# Altium PCB Bargraph_64_MCU.PcbDoc
Units mm, origin at the board's own origin, x right, y up, seen from the top; angles counter-clockwise.
Board outline 80 x 22 mm, 2 copper layers (Top Layer, Bottom Layer); 80 components, 82 nets, 272 pads, 71 vias.
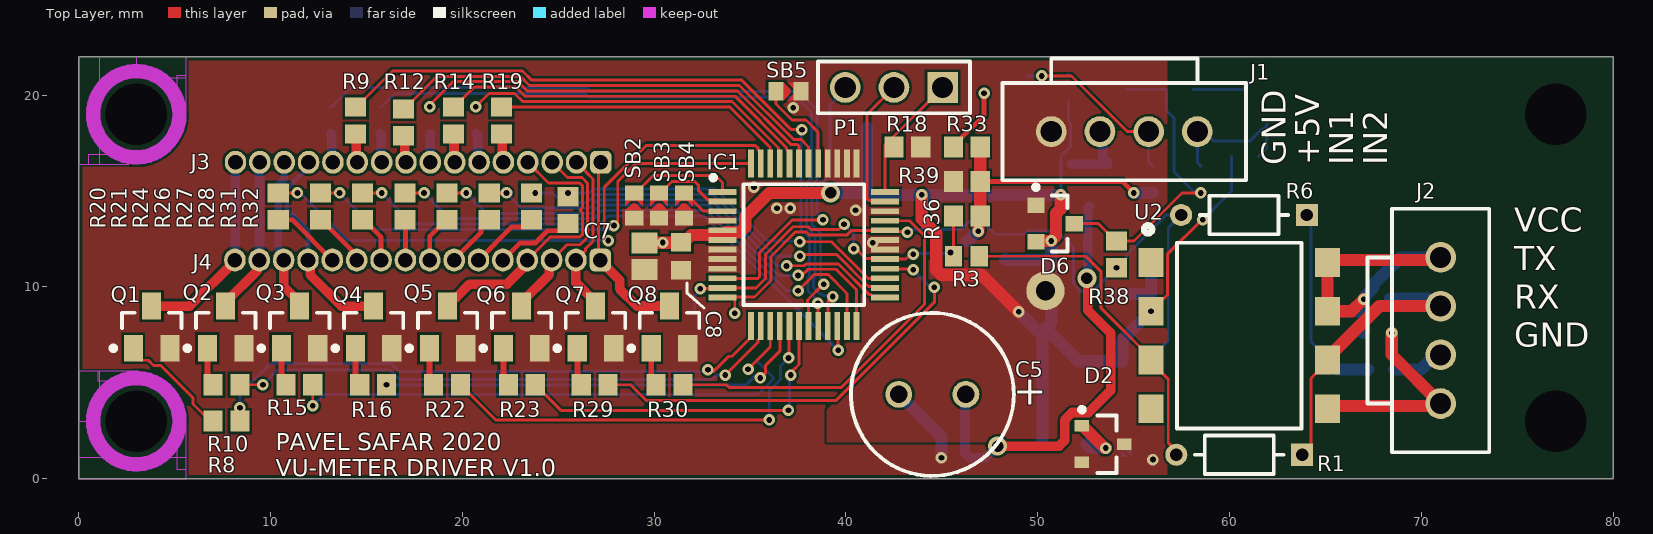
[diagram p0: Top Layer view]
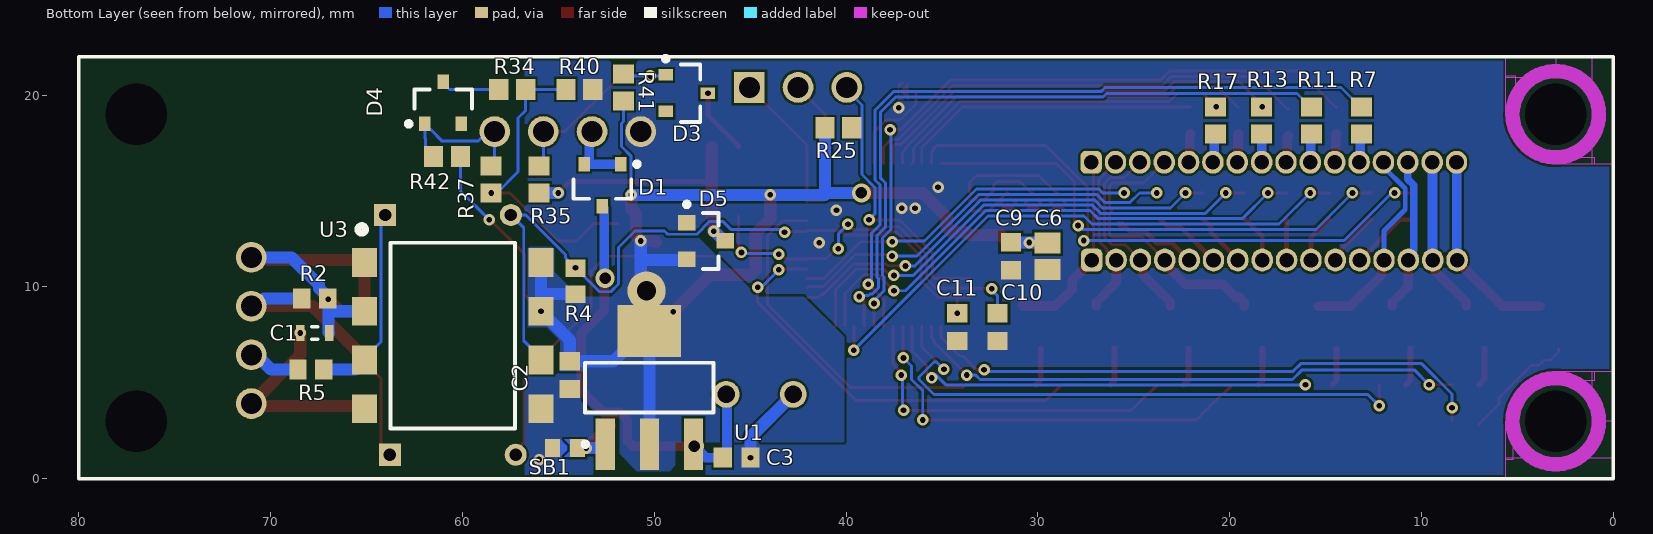
[diagram p1: Bottom Layer view, seen from below]

## Layer stack, top to bottom
Top Solder: solder mask 0.0102, Solder Resist, Dk 3.5
Top Layer: signal copper 0.0356
Dielectric 1: dielectric 0.32, FR-4, Dk 4.8
Bottom Layer: signal copper 0.0356
Bottom Solder: solder mask 0.0102, Solder Resist, Dk 3.5

## Board outline
0,0 80,0 80,22 0,22

## Design rules (kind name [scope] priority, off if disabled: settings)
BoardOutlineClearance [All] p1: gap=0.2 ignorepadtopadclearanceinfootprint=FALSE except(0.4: Arc-SplitBarrior Arc-SplitContinuation Track-SplitBarrior Track-SplitContinuation SMDPad-SplitBarrior SMDPad-SplitContinuation THPad-SplitBarrior THPad-SplitContinuation Via-SplitBarrior Via-SplitContinuation Fill-SplitBarrior Fill-SplitContinuation Poly-SplitBarrior Poly-SplitContinuation Region-SplitBarrior Region-SplitContinuation Text-SplitBarrior Text-SplitContinuation)
Clearance "Clearance Bottom Layer" [OnLayer('Bottom Layer')] p1: gap=0.127 ignorepadtopadclearanceinfootprint=TRUE except(0.203: Arc-Hole Track-Hole SMDPad-Hole THPad-Hole Via-Hole Fill-Hole Poly-Hole Region-Hole Text-Hole; 0.254: Text-Text)
Clearance "Clearance Top Layer" [OnLayer('Top Layer')] p2: gap=0.127 ignorepadtopadclearanceinfootprint=TRUE except(0.203: Arc-Hole Track-Hole SMDPad-Hole THPad-Hole Via-Hole Fill-Hole Poly-Hole Region-Hole Text-Hole)
Clearance [All] p3: gap=0.2 ignorepadtopadclearanceinfootprint=FALSE except(0.089: Arc-Arc Arc-Track Arc-SMDPad Track-Track Track-SMDPad SMDPad-SMDPad; 0.127: Arc-THPad Arc-Via Track-THPad Track-Via SMDPad-THPad SMDPad-Via THPad-THPad THPad-Via Via-Via; 0.254: Arc-Text Track-Text SMDPad-Text THPad-Text Via-Text Fill-Text Poly-Text Region-Text Text-Text)
HoleSize [All] p1: absolutevalues=TRUE maxlimit=6.3 minlimit=0.2 maxpercent=80.000 minpercent=20.000
MinimumAnnularRing [All] p1: minimumring=0.076
MinimumSolderMaskSliver [All] p1: minsoldermaskwidth=0.1
PlaneConnect [All] p1: planeconnectstyle=Direct reliefexpansion=0.508 reliefentries=4 reliefconductorwidth=0.254 reliefairgap=0.254
PolygonConnect PolygonConnect_1 [All] p1: connectstyle=Direct reliefconductorwidth=0.508 reliefentries=4 polygonreliefangle="90 Angle" airgapwidth=0.254
RoutingCorners [All] p1: cornerstyle=Round minsetback=2.54 maxsetback=2.54
RoutingVias [All] p1: holewidth=0.5 width=1 viastyle="Through Hole" minholewidth=0.2 minwidth=0.45 maxholewidth=1 maxwidth=2
SilkToSilkClearance [All] p1: silktosilkclearance=0.1
SilkToSolderMaskClearance [IsPad] p1: minsilkscreentomaskgap=0.1 clearancetoexposedcopper=TRUE
SolderMaskExpansion SolderMaskExpansion_1 [IsVia] p1: expansion=0 istentingtop=FALSE soldermaskfromhole=TRUE
SolderMaskExpansion pad [All] p2: expansion=0.05 istentingtop=FALSE
Width [All] p1: maxlimit=2.54 minlimit=0.152 preferedwidth=0.152
24 further rules are at their usual default settings.

## Components (designator, comment, footprint, x,y, rotation, side; value= is the part's Value field where it differs from the comment)
C1 "100n/50 X7R 0603" CAPC1608X90X20LL10 67.7,7.6 r180 bottom
C2 "1u/10 0603" SAMS-C0603-2_M 54.4,5.4 r90 bottom
C3 "1u/10 0603" SAMS-C0603-2_M 45.7,1.1 r0 bottom
C5 "ECA-1VM221" PNSC-ECA-1VM221-2 44.5,4.4 r180 top
C6 "10u/10 0805" CAPC2013X140X50LL20T25 29.5,11.6 r90 bottom
C7 "10u/10 0805" CAPC2013X140X50LL20T25 29.5,11.6 r90 top
C8 "100n/50 0603" SAMS-C0603-2_M 31.4,11.6 r90 top
C9 "100n/50 0603" SAMS-C0603-2_M 31.4,11.6 r90 bottom
C10 "10n/50 0603" SAMS-C0603-2_M 32.1,7.9 r90 bottom
C11 "10n/50 0603" SAMS-C0603-2_M 34.2,7.9 r90 bottom
D1 "BAS70-05" INF-SOT23_L 52.7,15.3 r270 bottom
D2 "BAS40" INF-SOT23_L 53.4,1.8 r0 top
D3 "BAS40" INF-SOT23_L 48.3,20.1 r180 bottom
D4 "BAS40" INF-SOT23_L 61,19.6 r90 bottom
D5 "BAS40-04LT1G" ONSC-SOT-23-3-318-08_V 47.3,12.4 r180 bottom
D6 "BAS40-04LT1G" ONSC-SOT-23-3-318-08_V 50.9,13.3 r0 top
IC1 "STM32G030C8T6" QFP50P900X900X160-48N 37.8,12.2 r0 top
J1 "CON_4" 4pos 54.51,18.1 r0 top
J2 "CON_4" 4pos 71,7.73 r90 top
J3 "16pin" 16pos_127 27.22,16.5 r180 top
J4 "16pin" 16pos_127 27.19,11.4 r180 top
P1 "61300311121" 61300311121 42.5,20.4 r180 top
Q1 "FDV303N" FAIR-FDV303N-3_V 3.8,7.9 r90 top
Q2 "FDV303N" FAIR-FDV303N-3_V 7.657,7.9 r90 top
Q3 "FDV303N" FAIR-FDV303N-3_V 11.514,7.9 r90 top
Q4 "FDV303N" FAIR-FDV303N-3_V 15.371,7.9 r90 top
Q5 "FDV303N" FAIR-FDV303N-3_V 19.229,7.9 r90 top
Q6 "FDV303N" FAIR-FDV303N-3_V 23.086,7.9 r90 top
Q7 "FDV303N" FAIR-FDV303N-3_V 26.943,7.9 r90 top
Q8 "FDV303N" FAIR-FDV303N-3_V 30.8,7.9 r90 top
R1 "CF18JT2K20" FP-CF18-MFG 60.5,1.25 r180 top value=2.2kΩ
R2 "1k 5% 0603" RESC1609X50X30ML10T20 67.7,9.4 r180 bottom
R3 "1k 5% 0603" RESC1609X50X30ML10T20 46.275,11.6 r0 top
R4 "1k 5% 0603" RESC1609X50X30ML10T20 54.1,10.3 r270 bottom
R5 "1k 5% 0603" RESC1609X50X30ML10T20 67.9,5.7 r0 bottom
R6 "CF18JT2K20" FP-CF18-MFG 60.75,13.75 r180 top value=2.2kΩ
R7 "330R 0603" RESC1608X55X30ML20T20 13.13,18.681 r90 bottom
R8 "82R 0603" RESC1608X55X30ML20T20 7.7,3 r180 top
R9 "330R 0603" RESC1608X55X30ML20T20 14.43,18.681 r90 top
R10 "82R 0603" RESC1608X55X30ML20T20 7.7,4.9 r180 top
R11 "330R 0603" RESC1608X55X30ML20T20 15.73,18.681 r90 bottom
R12 "330R 0603" RESC1608X55X30ML20T20 16.93,18.581 r90 top
R13 "330R 0603" RESC1608X55X30ML20T20 18.33,18.681 r90 bottom
R14 "330R 0603" RESC1608X55X30ML20T20 19.53,18.681 r90 top
R15 "82R 0603" RESC1608X55X30ML20T20 11.5,4.9 r180 top
R16 "82R 0603" RESC1608X55X30ML20T20 15.35,4.9 r180 top
R17 "330R 0603" RESC1608X55X30ML20T20 20.73,18.681 r90 bottom
R18 "330R 0603" RESC1608X55X30ML20T20 43.2,17.3 r0 top
R19 "330R 0603" RESC1608X55X30ML20T20 22.03,18.681 r90 top
R20 "330R 0603" RESC1608X55X30ML20T20 10.4,14.2 r90 top
R21 "330R 0603" RESC1608X55X30ML20T20 12.6,14.2 r90 top
R22 "82R 0603" RESC1608X55X30ML20T20 19.2,4.9 r180 top
R23 "82R 0603" RESC1608X55X30ML20T20 23.1,4.9 r180 top
R24 "330R 0603" RESC1608X55X30ML20T20 14.8,14.2 r90 top
R25 "2k 5% 0603" RESC1608X55X30ML20T20 40.4,18.3 r0 bottom
R26 "330R 0603" RESC1608X55X30ML20T20 17,14.2 r90 top
R27 "330R 0603" RESC1608X55X30ML20T20 19.2,14.2 r90 top
R28 "330R 0603" RESC1608X55X30ML20T20 21.4,14.2 r90 top
R29 "82R 0603" RESC1608X55X30ML20T20 26.9,4.9 r180 top
R30 "82R 0603" RESC1608X55X30ML20T20 30.8,4.9 r180 top
R31 "330R 0603" RESC1608X55X30ML20T20 23.6,14.2 r90 top
R32 "330R 0603" RESC1608X55X30ML20T20 25.5,14 r90 top
R33 "330R 0603" RESC1608X55X30ML20T20 46.3,17.3 r0 top
R34 "330R 0603" RESC1608X55X30ML20T20 57.4,20.3 r180 bottom
R35 "330R 0603" RESC1608X55X30ML20T20 56,15.6 r270 bottom
R36 "330R 0603" RESC1608X55X30ML20T20 46.3,13.7 r180 top
R37 "330R 0603" RESC1608X55X30ML20T20 58.5,15.6 r270 bottom
R38 "330R 0603" RESC1608X55X30ML20T20 54.1,11.7 r270 top
R39 "330R 0603" RESC1608X55X30ML20T20 46.3,15.5 r0 top
R40 "330R 0603" RESC1608X55X30ML20T20 53.9,20.3 r0 bottom
R41 "330R 0603" RESC1608X55X30ML20T20 51.6,20.4 r270 bottom
R42 "330R 0603" RESC1608X55X30ML20T20 60.8,16.8 r180 bottom
SB1 "0R" SB0603 54.65,1.6 r0 bottom
SB2 "0R" SB0603 28.957,14.246 r270 top
SB3 "0R" SB0603 30.257,14.246 r270 top
SB4 "0R" SB0603 31.557,14.246 r270 top
SB5 "0R" SB0603 37,20.2 r180 top
U1 "LM1117MP-3.3" MP04A_M 50.25,4.75 r90 bottom
U2 "6N137S-P" dip8_smd 60.5,10 r270 top
U3 "6N137S-P" dip8_smd 60.5,10 r270 bottom

## Footprints (in the part's own frame and the unit in brackets; to place one, negate y for a bottom-side part, rotate by r counter-clockwise, add the part's x,y. Pads: shape width x height; smd on the part's side, far side on the other; paste and mask are expansions set on the pad)
4pos [mm]
  round 1.6 hole 1.1: 1(-3.81,0) 2(-1.27,0) 3(1.27,0) 4(3.81,0)
  silkscreen extent -6.35,-2.54 6.35,3.81, body extent -6.35,-2.54 6.35,4.06, height 11.81
16pos_127 [mil]
  rrect50% 44x47 hole 30 mask+2: 1(0,0)
  oval 44x47 hole 30 mask+2: 2(50,0) 3(100,0) 4(150,0) 5(200,0) 6(250,0) 7(300,0) 8(350,0) 9(400,0) 10(450,0) 11(500,0) 12(550,0) 13(600,0) 14(650,0) 15(700,0) 16(750,0)
61300311121 [mm] "Pin Header, pitch 2.54 mm, THT, Vertical, single row, 3p"
  rect 1.6x1.6 hole 1.1: 1(-2.54,0)
  round 1.6 hole 1.1: 2(0,0) 3(2.54,0)
  silkscreen extent -3.96,-1.35 3.96,1.35, body extent -3.81,-1.27 3.81,1.27, height 8.57
CAPC1608X90X20LL10 [mm] "Chip Capacitor, 2-Leads, Body 1.70x0.90mm, IPC High Density"
  rect 0.45x0.85 smd: 1(-0.75,0) 2(0.75,0)
  silkscreen extent -0.15,-0.33 0.15,0.33, body extent -0.85,-0.45 0.85,0.45, height 0.9
CAPC2013X140X50LL20T25 [mm] "Chip Capacitor, 2-Leads, Body 2.00x1.25mm, IPC High Density"
  rect 1.1x1.35 smd: 1(-0.7,0) 2(0.7,0)
  body extent -1.1,-0.72 1.1,0.72, height 1.4
dip8_smd [mm]
  rect 1.5x1.3 smd: 1(-1.27,-4.6) 2(1.27,-4.6) 3(3.81,-4.6) 4(6.35,-4.6) 5(6.35,4.6) 6(3.81,4.6) 7(1.27,4.6) 8(-1.27,4.6)
  silkscreen extent -3.2,-4.95 7.38,3.25, body extent -2.34,-5.07 7.42,5.08, height 3.66
FAIR-FDV303N-3_V [mm] "SOT23, 3-Leads, Body 3.12x1.50mm, Pitch 0.95mm"
  rect 1.4x1 smd: 1(-1.1,0.95) 2(-1.1,-0.95) 3(1.1,0)
  silkscreen extent -1.22,-1.55 0.75,2.12, body extent -0.75,-1.56 0.75,1.56, height 1.2
FP-CF18-MFG [mm]
  rect 1.15x1.15 hole 0.65 paste-1000 mask+0: 1(-3.28,0)
  round 1.15 hole 0.65 paste-1000 mask+0: 2(3.28,0)
  silkscreen extent -2.3,-1 2.3,1
INF-SOT23_L [mm] "SOT23, 3-Leads, Body 2.9x1.3 mm, Pitch 0.95 mm, IPC High Density"
  rect 0.75x0.6 smd: 1(-1.1,0.95) 2(-1.1,-0.95) 3(1.1,0)
  silkscreen extent -1.22,-1.5 0.7,1.92, body extent -0.7,-1.5 0.7,1.5, height 1.1
MP04A_M [mm] "SOT223, 4-Leads, Body 6.5x3.5mm, Pitch 2.3mm, Lead Span 7mm, IPC Low Density"
  rect 2.7x1 smd: 1(-2.95,2.3) 2(-2.95,0) 3(-2.95,-2.3)
  rect 2.7x3.3 smd: 4(2.95,0)
  silkscreen extent -3.07,-3.35 1.3,3.48, body extent -1.86,-3.35 1.86,3.35, height 1.8
ONSC-SOT-23-3-318-08_V [mm] "SOT23, 3-Leads, Body 2.92x1.3mm, Pitch 0.95mm"
  rect 0.9x0.8 smd: 1(-1,0.95) 2(-1,-0.95) 3(1,0)
  silkscreen extent -1.13,-1.46 0.65,2.02, body extent -0.65,-1.46 0.65,1.46, height 1.11
PNSC-ECA-1VM221-2 [mm] "THD, 2-Leads, Dia 8.5mm, Body Length 12.5mm, Pin Spacing 3.5mm"
  round 1.4 hole 0.9: 1(-1.75,0) 2(1.75,0)
  silkscreen extent -4.25,-4.25 4.25,4.25, body extent -4.25,-4.25 4.25,4.25, height 12.5
QFP50P900X900X160-48N [mm]
  rect 1.475x0.3 smd: 1(-4.238,2.75) 2(-4.238,2.25) 3(-4.238,1.75) 4(-4.238,1.25) 5(-4.238,0.75) 6(-4.238,0.25) 7(-4.238,-0.25) 8(-4.238,-0.75) 9(-4.238,-1.25) 10(-4.238,-1.75) 11(-4.238,-2.25) 12(-4.238,-2.75) 25(4.238,-2.75) 26(4.238,-2.25) 27(4.238,-1.75) 28(4.238,-1.25) 29(4.238,-0.75) 30(4.238,-0.25) 31(4.238,0.25) 32(4.238,0.75) 33(4.238,1.25) 34(4.238,1.75) 35(4.238,2.25) 36(4.238,2.75)
  rect 0.3x1.475 smd: 13(-2.75,-4.238) 14(-2.25,-4.238) 15(-1.75,-4.238) 16(-1.25,-4.238) 17(-0.75,-4.238) 18(-0.25,-4.238) 19(0.25,-4.238) 20(0.75,-4.238) 21(1.25,-4.238) 22(1.75,-4.238) 23(2.25,-4.238) 24(2.75,-4.238) 37(2.75,4.238) 38(2.25,4.238) 39(1.75,4.238) 40(1.25,4.238) 41(0.75,4.238) 42(0.25,4.238) 43(-0.25,4.238) 44(-0.75,4.238) 45(-1.25,4.238) 46(-1.75,4.238) 47(-2.25,4.238) 48(-2.75,4.238)
  silkscreen extent -4.85,-3.15 3.15,3.62, body extent -4.5,-4.5 4.5,4.5, height 1.6
RESC1608X55X30ML20T20 [mm] "Chip Resistor, 2-Leads, Body 1.60x0.80mm, IPC Low Density"
  rect 1x1.1 smd: 1(-0.7,0) 2(0.7,0)
  body extent -0.9,-0.5 0.9,0.5, height 0.55
RESC1609X50X30ML10T20 [mm] "Chip Resistor, 2-Leads, Body 1.55x0.85mm, IPC Low Density"
  rect 0.9x1.05 smd: 1(-0.675,0) 2(0.675,0)
  body extent -0.82,-0.48 0.82,0.48, height 0.5
SAMS-C0603-2_M [mm] "Chip Capacitor, 2-Leads, Body 1.70x0.90mm, IPC Low Density"
  rect 0.95x1.05 smd: 1(-0.725,0) 2(0.725,0)
  body extent -0.85,-0.45 0.85,0.45, height 0.9
SB0603 [mm] "Chip Resistor, 2-Leads, Body 1.65x0.95mm, IPC Medium Density"
  rect 0.8x0.95 smd: 1(-0.65,0) 2(0.65,0)
  Top Layer region: -0.102,0.102 0.254,0.457 0.254,-0.457 -0.102,-0.102
  Top Layer region: 0.038,0.457 -0.279,0.457 -0.279,-0.432 -0.254,-0.457 0.036,-0.457 -0.254,-0.168 -0.254,0.165
  body extent -0.82,-0.48 0.82,0.47, height 0.5

## Part data
C1: library part CMP-2000-07546-1, "Chip Capacitor, 0.1 uF, +/- 10%, 50 V, -55 to 125 degC, 0603 (1608 Metric), RoHS, Tape and Reel", Capacitance=100nF, Case Code (Imperial)=0603, Case Code (Metric)=1608, Dielectric=X7R, Manufacturer=TDK, Max Operating Temperature=125degC, Min Operating Temperature=-55degC, Package Description="2-Pin Surface Mount Device, Body 1.6 x 0.8 mm", Package Quantity=1, Package Reference=603, Tolerance=10%, Voltage=50V, Case/Package=0603, Composition=Ceramic, Datasheet URL=https://product.tdk.com/info/en/catalog/datasheets/mlcc_automotive_general_en.pdf, Datasheet Version=12/2014, Depth=0.8mm, Height=0.8mm, Lead Free=LeadFree, Length=1.6mm, Manufacturer URL=http://www.tdk.com/, Mount=SurfaceMount, Mounting Technology=SurfaceMount, Packaging=TapeandReel, Radiation Hardening=No, REACH SVHC=NoSVHC, RoHSCompliant=True, Termination=SMD/SMT, Thickness=0.035inch, Voltage Rating=50V, Voltage Rating (DC)=50V, Weight=7.1E-05oz, Width=0.8mm
C2 C3 C8 C9 C10 C11: library part CMP-2000-05332-1, "Multi-layer Ceramic Capacitor, -55 to 125 degC, 2-Pin SMD (0603), RoHS, Tape and Reel", Capacitance=0.1µF, Case Size/Dimension=0603, Dielectric=X7R, Manufacturer="Samsung Electro-Mechanics", Rated Voltage=50V, Tolerance (%)=±10%, Datasheet URL=https://datasheet.ciiva.com/29198/456651-da-01-en-vs-kondensator-0605-29198839.pdf, Datasheet Version=Nov-10, Manufacturer URL=http://www.samsungsem.com/global/index.jsp
C5: library part CMP-2000-05311-1, "Aluminum Electrolytic Capacitor, 220 uF, +/- 20%, 35 V, -40 to 85 degC, 2-Pin THD, RoHS, Bulk", Capacitance=220µF, Case Size/Dimension=Ø8x11.5mm, Lifetime@Temperature=2000Hrs@85degC, Manufacturer=Panasonic, Operating Temp Range=-40to+85degC, Operating Temp-Max=85degC, Package Description="2-Pin Axial Lead, Dia 8 mm, Body Length 12.5 mm", Rated Voltage=35V, Ripple Current=350mA, Datasheet URL=https://datasheet.ciiva.com/26341/441851-da-01-en-elko-eca1vm221-m-r-220myf-35v-85c-26341906.pdf, Datasheet Version=Mar-06, Manufacturer URL=http://www.panasonic.com/, Package Reference=ECA-1VM221, Series=M, Type=Radial
C6 C7: library part CMP-2007-03243-1, Manufacturer=Kemet, Part Number=C0805C106K8PACTU
D1: library part CMP-1182-00018-1, "Silicon Schottky Diode, -55 to 125 degC, SOT23, Reel, Green", Manufacturer=Infineon, ComponentLink1Description="Manufacturer URL", ComponentLink1URL=http://www.infineon.com/, ComponentLink2Description=Datasheet, ComponentLink2URL=http://www.infineon.com/dgdl/bas70_bas170series.pdf?folderId=db3a30431400ef68011425f1ca2505e3&fileId=db3a304314dca389011518ad41680e12, ComponentLink3Description="Package Specification", ComponentLink3URL=http://www.infineon.com/dgdl/SOT23-Package_Overview.pdf?folderId=db3a30431936bc4b0119532290053c66&fileId=db3a30431936bc4b0119533468123c85, Configuration=Dual, CT (max)="2Â pF", Green=TRUE, IF (max)="70Â mA", Mounting Technology="Surface Mount", PackageDescription="3-Pin Small Outline Transistor Package, 1.3 x 2.9 mm Body, 0.95 mm Pitch", PackageReference=SOT23, PackageVersion=Apr-08, Packing=Reel, PartNumber=BAS70-05, VF (max)="1,000Â mV", VR (max)="70Â V"
D2 D3 D4: library part CMP-1182-00023-1, "Silicon Schottky Diode, -55 to 150 degC, SOT23, Reel, Green", Manufacturer=Infineon, ComponentLink1Description="Manufacturer URL", ComponentLink1URL=http://www.infineon.com/, ComponentLink2Description=Datasheet, ComponentLink2URL=http://www.infineon.com/dgdl/bas40_bas140series.pdf?folderId=db3a30431400ef68011425f1ca2505e3&fileId=db3a304314dca389011518a57ed20e11, ComponentLink3Description="Package Specification", ComponentLink3URL=http://www.infineon.com/dgdl/SOT23-Package_Overview.pdf?folderId=db3a30431936bc4b0119532290053c66&fileId=db3a30431936bc4b0119533468123c85, Configuration=Single, CT (max)="5Â pF", Green=TRUE, IF (max)="120Â mA", Mounting Technology="Surface Mount", PackageDescription="3-Pin Small Outline Transistor Package, 1.3 x 2.9 mm Body, 0.95 mm Pitch", PackageReference=SOT23, PackageVersion=Apr-08, Packing=Reel, PartNumber=BAS40, VF (max)="1,000Â mV", VR (max)="40Â V"
D5 D6: library part CMP-1055-00530-1, "Dual Series Schottky Barrier Diodes, 3-Pin SOT-23, Pb-Free, Tape and Reel", Manufacturer="On Semiconductor", ComponentLink1Description="Manufacturer URL", ComponentLink1URL=http://www.onsemi.com/, ComponentLink2Description=Datasheet, ComponentLink2URL=http://www.onsemi.cn/pub_link/Collateral/BAS40-04LT1-D.PDF, ComponentLink3Description="Package Specification", ComponentLink3URL=http://www.onsemi.cn/pub_link/Collateral/318-08.PDF, Configuration=Series, DatasheetVersion="Rev. 11", Mounting Technology="Surface Mount", PackageDescription="3-Pin Small Outline Transistor, Body 2.92 x 1.3 mm, Pitch 0.95 mm", PackageReference=SOT-23-3-318-08, PackageVersion="Rev. AP, 11/2009", Packing="Tape and Reel", PartNumber=BAS40-04LT1G, RoHS=TRUE
IC1: "Integrated Circuit", Manufacturer_Name=STMicroelectronics, Mouser Part Number=511-STM32G030C8T6, Arrow Part Number=STM32G030C8T6, Arrow Price/Stock=https://www.arrow.com/en/products/stm32g030c8t6/stmicroelectronics, Datasheet Link=https://componentsearchengine.com/Datasheets/1/STM32G030C8T6.pdf, Height=1.6mm, Manufacturer_Part_Number=STM32G030C8T6, Mouser Price/Stock=https://www.mouser.co.uk/ProductDetail/STMicroelectronics/STM32G030C8T6?qs=uwxL4vQweFMKBA8wRRkiWA%3D%3D
J1 J2: "THT Vertical Pin Header WR-PHD, Pitch 2.54 mm, Single Row", Contact Resistance=20mOhm, Manufacturer="Wurth Elektronik", Operating Temperature=-40to105degC, Package Reference=61300311121, Rated Current=3A, Withstanding Voltage=500VAC, Working Voltage=250VAC, Datasheet URL=https://katalog.we-online.de/em/datasheet/6130xx11121.pdf, Gender=Male, Manufacturer URL=http://www.we-online.de, Mounting Technology=THT, Orientation=Vertical, Packaging=Bag, Part Number=61300311121, Pin Number=3, Pitch=2.54mm, Publisher=WurthElektronik, Row Number=Single
J3 J4: "SQ Post Socket, Through-hole, Vertical, -55 to 125 degC, 1.,27 mm Pitch, 16-Pin, male, RoHS", Manufacturer=Samtec, PartNumber=SSW-116-02-G-S, Temperature Range="-55 to 125 degC", ComponentLink1Description="Manufacturer URL", ComponentLink1URL=http://www.samtec.com, ComponentLink2Description=Datasheet, ComponentLink2URL=http://www.samtec.com/documents/webfiles/pdf/SSW_TH.PDF, ComponentLink3Description="Package Specification", ComponentLink3URL=http://www.samtec.com/documents/webfiles/cpdf/SSW-1XX-XX-XXX-X-XX-XXX-XX-MKT.pdf, DatasheetVersion=F-214, Mounting Technology=Through-hole, Orientation=Vertical, PackageDescription="Assembly, Socket Strip .016 X .031 Tail", PackageReference=SSW-116-02-X-S, PackageVersion="CA, 6/1987", Pitch="2.54 mm", RoHS=True
P1: library part CMP-1502-01062-1, "THT Vertical Pin Header WR-PHD, Pitch 2.54 mm, Single Row, 3 pins", Contact Resistance=20mOhm, Manufacturer="Wurth Elektronik", Operating Temperature=-40to105degC, Rated Current=3A, Withstanding Voltage=500VAC, Working Voltage=250VAC, Datasheet URL=https://katalog.we-online.de/em/datasheet/6130xx11121.pdf, Gender=Male, Manufacturer URL=http://www.we-online.de, Mounting Technology=THT, Orientation=Vertical, Package Reference=61300311121, Packaging=Bag, Part Number=61300311121, Pin Number=3, Pitch=2.54mm, Publisher=WurthElektronik, Row Number=Single
Q1 Q2 Q3 Q4 Q5 Q6 Q7 Q8: library part CMP-2000-05111-1, "N-Channel MOSFET Transistor, 8 V VGSS, 25 V VDSS, 0.68 A, -55 to 150 degC, 3-Pin SOT23, RoHS, Tape and Reel", Manufacturer=Fairchild, Maximum Continuous Drain Current=0.68A, Maximum Drain Source Voltage=25V, Maximum Gate Source Voltage=8V, Operating Temperature=-55to150degC, Package=3SOT-23, Category=MOSFET, Channel Mode=Enhancement, Channel Type=N, Datasheet URL=https://datasheet.ciiva.com/22681/1845307-22681736.pdf, Datasheet Version="Rev. D2, 07/2014", Manufacturer URL=https://www.fairchildsemi.com/, Mounting=SurfaceMount, Packaging=Tape&Reel, Rad Hard=No, RDS-on=450@4.5VmOhm, Typical Fall Time=13ns, Typical Rise Time=8.5ns, Typical Turn-Off Delay Time=17ns, Typical Turn-On Delay Time=3ns
R1 R6: library part CMP-26528-000001-1, "RES 2.2K OHM 1/8W 5% CF AXIAL", Manufacturer="Stackpole Electronics Inc", Package=CF18, Power Rating=0.125W, Resistance=2.2kΩ, Temperature="-55°C to +155°C", Temperature Coefficient=0/-400ppm/°C, Temperature Range High=+155°C, Temperature Range Low=-55°C, Tolerance=5%, Voltage Rating=250V, Automotive=No, Category=Res, ComponentLink2Description=Datasheet, ComponentLink2URL=https://www.seielect.com/catalog/sei-cf_cfm.pdf, Composition="Carbon Film", Device Class L1="Passive Components", Device Class L2=Resistors, Device Class L3="Through-Hole Resistors", Digikey Description="RES 2.2K OHM 1/8W 5% CF AXIAL", Height=2mm, Ipc Land Pattern Name=RESAD656W65L360D200, Lead Free=Yes, Manufacturer Part Number=CF18JT2K20, Octopart=https://octopart.com/cf18jt2k20-stackpole+electronics-19205714, RoHS=TRUE, Series=CF
R2 R3 R4 R5: library part CMP-2000-03379-1, Manufacturer="Vishay Dale", Part Number=CRCW060347K0FKEA
R7 R8 R9 R10 R11 R12 R13 R14 R15 R16 R17 R18 R19 R20 R21 R22 R23 R24 R25 R26 R27 R28 R29 R30 R31 R32 R33 R34 R35 R36 R37 R38 R39 R40 R41 R42: library part CMP-2000-00873-1, Manufacturer=Panasonic, Part Number=ERA3AEB102V
SB1 SB2 SB3 SB4 SB5: library part SB, Manufacturer=Panasonic, Part Number=ERA3AEB102V
U1: library part CMP-0062-01658-3, "800mA Low-Dropout Linear Regulator, 4-pin SOT-223", Manufacturer="National Semiconductor", PackageTopMarking=XYTT*N05A, PowerWise=N, Code_IPC=SOT223-4, Code_JEDEC=TO-261-AA, ComponentLink1Description="Manufacturer URL", ComponentLink1URL=http://www.national.com/, ComponentLink2Description="LM1117 Datasheet", ComponentLink2URL=http://www.national.com/ds/LM/LM1117.pdf, ComponentLink3Description="LM1117 Web Page", ComponentLink3URL=http://www.national.com/pf/LM/LM1117.html, ComponentLink4Description="MP04A Package Page", ComponentLink4URL=http://www.national.com/packaging/folders/mp04a.html, CompType="LDO IC", DatasheetVersion=Apr-2006, High-Reliability=Y, PackageDescription="Molded SOT-223, 6.50 x 3.56 x 1.6mm Body, 4 Lead, 2.3mm Pitch", PackageReference=MP04A, PackageVersion="revB, Apr-2003", PartNumber=LM1117MP-3.3, PinCount=4, RevisionNote="SCH symbol layout adjusted", RoHS=N
U2 U3: "Phototransistor Optocoupler, 4 us Rise, 3 us Fall, 5000 Vrms, -55 to 110 degC, 4-Pin MDIP, RoHS, Tape and Reel", Current - DC Forward (If) (Max)=50mA, Current Transfer Ratio (Max)=600%@5mA, Current Transfer Ratio (Min)=300%@5mA, Manufacturer="Fairchild Semiconductor", Operating Temperature=-55°C~110°C, Package / Case=4-SMD,GullWing, Package Description="4-Pin Surface Mount Device, Body 6.5 x 4.6 mm, Pitch 2.54 mm", Package Reference="MDIP 4L", Package Version=10/2014, Standard Package=1, Supplier Device Package=4-SMD, Voltage - Forward (Vf) (Typ)=1.2V, Voltage - Isolation=5000Vrms, Voltage - Output (Max)=70V, Category=Isolators, Current - Output / Channel=50mA, Datasheet URL=https://www.fairchildsemi.com/datasheets/FO/FOD817D.pdf, Datasheet Version="Rev. 2.8, 11/2015", Family=Optoisolators-Transistor,PhotovoltaicOutput, Input Type=DC, Manufacturer URL=https://www.fairchildsemi.com/, Mounting Technology=SurfaceMount, Mounting Type=SurfaceMount, Number of Channels=1, Online Catalog=FOD617,814,817Series, Other Names=FOD817DSDDKR, Output Type=Transistor, Package URL=https://www.fairchildsemi.com/package-drawings/N0/N04C.pdf, Packaging=Digi-Reel®, Rise / Fall Time (Typ)=4µs,3µs, Series=-, Turn On / Turn Off Time (Typ)=-, Vce Saturation (Max)=200mV

## Free pads (board coordinates)
  round 0 hole 3.2 unplated mask+0.051: 17(3,3) 17(3,19) 17(77,3) 17(77,19)
  round 2 hole 1 mask+0.051: 19(50.4,9.8)

## Via types
v1: diameter 0.6, hole 0.3, Top Layer to Bottom Layer, 68 vias
v2: diameter 1, hole 0.6, Top Layer to Bottom Layer, 3 vias

## Nets (pads, with @x,y where several pads share a name; then routed paths per layer and width w, separated by ;. In a path a pad name is that pad's centre, name@x,y a point inside that pad or via, vN(x,y) a via of type N, cw(c..) or ccw(c..) an arc to the next point about the centre after c; other vN are vias at no path point)
+3V3: C2.2 C6.2 C7.2 C8.2 C9.2 D5.2 D6.2 IC1.5 IC1.6 pad.19 R4.2 R25.2 R41.2 R42.2 U1.2 U1.4 U2.2 U3.7 U3.8 | length 83.6
  Top Layer w0.152: v1(55.9,8.73) 56.753,9.583 56.753,11.7 58.553,13.5 v1(58.6,13.5)
  Top Layer w0.635: C7.2 31.529,12.3 31.929,12.7 33.562,12.7 33.718,12.856 IC1.5@33.856,12.856 ; IC1.5@33.982,12.856 34.484,12.856 34.744,13.116 34.744,13.644 36,14.9 v2(39.2,14.9) ; v1(43.953,14.8) 43.953,13.547 44.705,12.795 44.705,10.891 44.966,10.63 47.07,10.63 v1(49,8.7) ; D6.2 49.95,12.4 v1(50.7,12.4) 50.95,12.65 50.95,13.829 51.2,14.079 v1(51.2,14.8)
  Bottom Layer w0.152: v1(51.2,14.8) 51.2,16.812 51.703,17.316 51.703,18.516 51.6,18.619 R41.2 ; v1(58.6,13.5) 60.1,15 R42.2
  Bottom Layer w0.635: C6.2 29.512,12.313 31.387,12.313 C9.2 ; v2(39.2,14.9) 41,14.9 41.1,14.8 ; R25.2 41.1,14.8 ; D5.2 48.35,11.4 50.7,11.4 ; v1(49,8.7) 50,7.7 U1.4 ; U1.2 U1.4 ; v1(50.7,12.4) 50.7,11.4 ; v1(51.2,14.8) v1(43.953,14.8) 41.1,14.8 ; R4.2 55.775,9.625 55.9,9.5 ; U3.8 55.9,9.5 ; U1.4 50.7,8.15 50.7,11.4 ; U1.4 50.55,7.7 52.125,6.125 C2.2 54.4,7.23 55.468,8.297 55.568,8.297 55.9,8.63 v1(55.9,8.73) 55.9,9.5
  other v1: 30.45,12.313
+5: C3.2 C5.1 D1.3 U1.3 | length 23
  Top Layer w0.508: v2(47.9,1.7) 51.102,1.7 51.4,1.998 51.4,3.064 51.785,3.448 52.649,3.448 53.8,4.6 53.8,7.6 52.6,8.8 52.6,10.412 v2(52.561,10.451)
  Bottom Layer w0.508: C5.1 46.204,4.354 46.204,1.321 C3.2 47.3,1.1 v2(47.9,1.7) ; v2(52.561,10.451) 52.561,10.461 52.6,10.5 52.6,14.1 D1.3
GND: C2.1 C3.1 C5.2 C6.1 C7.1 C8.1 C9.1 C10.1 C11.1 D2.2 D2.3 D5.1 D6.1 IC1.4 IC1.7 IC1.8 IC1.9 IC1.30 IC1.31 IC1.34 IC1.37 IC1.38 IC1.39 IC1.40 J1.1 Q1.2 Q2.2 Q3.2 Q4.2 Q5.2 Q6.2 Q7.2 Q8.2 R18.2 R39.1 R40.1 SB1.2 SB2.2 SB3.2 SB4.2 SB5.1 U3.5 | length 4.2
  Bottom Layer w0.635: C5.2 44.975,2.175 v1(44.975,1.1)
  other v1: 56,1 41.4,12.3 40.5,14 36.4,14.1 37.094,14.106 35.2,15.2 37.247,19.347
GND_ISO: C1.1 J2.1 U2.5 | length 10.7
  Top Layer w0.635: U2.5 65.235,3.785 70.865,3.785 J2.1 68.45,6.47 v1(68.45,7.6)
NetC10_2: C10.2 IC1.11 IC1.29 R3.1 R36.2 | length 20.3
  Top Layer w0.152: v1(32.4,9.9) 32.425,9.925 33.537,9.925 IC1.11 35.306,9.95 35.8,10.444 35.8,11.695 37.243,13.139 38.05,13.139 38.192,12.997 39.632,12.997 v1(39.9,13.265) ; v1(40.4,11.997) 40.503,11.997 41.012,11.488 42,11.488 IC1.29 43.129,11.45 43.379,11.7 v1(43.5,11.7) ; v1(45.45,11.8) R3.1@45.6,11.8 ; R3.1 R3.1@45.6,11.8 ; R36.2 R3.1@45.6,11.8
  Bottom Layer w0.152: C10.2 32.1,9.539 32.4,9.839 v1(32.4,9.9) ; v1(39.9,13.265) 40.4,12.765 v1(40.4,11.997) ; v1(43.5,11.7) 43.55,11.75 45.4,11.75 v1(45.45,11.8)
NetC11_2: C11.2 IC1.12 IC1.32 R4.1 R6.2 R38.2 U3.6 | length 40.1
  Top Layer w0.152: IC1.12 IC1.12@34.126,9.45 ; v1(34.2,8.625) 34.2,9.376 IC1.12@34.126,9.45 ; v1(43.203,12.849) 43.152,12.9 42.088,12.9 IC1.32 40.297,12.95 40.064,12.717 38.076,12.717 37.934,12.859 37.359,12.859 36.092,11.592 36.092,10.341 35.23,9.479 34.155,9.479 IC1.12@34.126,9.45
  Bottom Layer w0.152: v1(43.203,12.849) 43.356,13.003 46.003,13.003 46.421,13.421 47.116,13.421 47.441,13.096 47.441,13.072 47.766,12.747 49.293,12.747 49.467,12.921 50.994,12.921 51.858,12.058 51.858,10.16 52.269,9.748 52.852,9.748 53.476,10.372 53.476,10.376 v1(54.1,11) ; R4.1 v1(54.1,11) ; U3.6 55.9,6.29 56.8,7.19 56.8,13.08 R6.2 56.693,13.75 54.633,11.69 54.633,11.533 v1(54.1,11)
NetD1_1: D1.1 D1.2 J1.2 | length 3.8
  Bottom Layer w0.508: D1.1 D1.2 53.65,16.475 53.384,16.741 53.384,17.956 J1.2
NetD2_1: D2.1 SB1.1 U1.1 | length 2.8
  Top Layer w0.635: D2.1 52.34,2.75 53.49,1.6 v1(53.542,1.6)
  Bottom Layer w0.635: U1.1 52.55,1.783 52.733,1.6 v1(53.542,1.6)
NetD3_1: D3.1 J1.3 R35.1 R41.1 | length 10.9
  Top Layer w0.152: v1(50.2,21) 51.759,21 54.659,18.1 J1.3
  Bottom Layer w0.152: D3.1 49.45,21 v1(50.2,21) 51.5,21 R41.1 ; J1.3 55.78,16.52 R35.1
NetD3_3: D3.3 R33.1 | length 3.5
  Top Layer w0.254: R33.1 45.6,17.35 47.2,18.95 v1(47.2,20.1)
NetD4_1: D4.1 J1.4 R37.1 R42.1 | length 7.9
  Bottom Layer w0.152: R37.1 58.32,16.48 J1.4 58.688,18.1 59.188,17.6 61.05,17.6 61.651,18.201 61.726,18.201 D4.1@61.95,18.425 ; R42.1 61.924,17.224 61.924,17.724 61.95,17.751 D4.1@61.95,18.425 ; D4.1 D4.1@61.95,18.425
NetD4_3: D4.3 R34.1 | length 3.1
  Bottom Layer w0.152: R34.1 60.675,20.3 61,20.625 D4.3
NetD5_3: D5.3 R33.2 R35.2 R36.1 R39.2 | length 14.5
  Top Layer w0.254: R39.2 54.4,15.5 v1(55,14.9)
  Top Layer w0.635: v1(46.9,12.9) 46.9,13.6 R36.1 R39.2 R33.2
  Bottom Layer w0.635: D5.3 46.35,12.4 46.85,12.9 v1(46.9,12.9) ; v1(55,14.9) R35.2
NetD6_3: D6.3 R34.2 R37.2 R38.1 R40.2 | length 16.4
  Top Layer w0.152: D6.3 53.15,13.3 54.05,12.4 R38.1 55.019,12.4 57.519,14.9 v1(58.5,14.9)
  Bottom Layer w0.152: R40.2 R34.2 56.7,19.2 57.1,18.8 57.1,16 58.2,14.9 v1(58.5,14.9)
NetIC1_1: IC1.1 SB2.1 | length 5.6
  Top Layer w0.152: SB2.1 29.032,14.896 29.936,15.8 33.2,15.8 33.562,15.438 IC1.1
NetIC1_2: IC1.2 SB3.1 | length 4.2
  Top Layer w0.152: SB3.1 30.332,14.896 30.935,15.499 32.116,15.499 32.3,15.316 32.3,15.037 32.813,14.524 33.488,14.524 IC1.2
NetIC1_3: IC1.3 SB4.1 | length 2.4
  Top Layer w0.152: SB4.1 31.632,14.896 32.578,13.95 IC1.3
NetIC1_10: IC1.10 P1.3 R25.1 | length 14.9
  Top Layer w0.152: IC1.10 35.411,10.45 35.5,10.539 35.5,11.79 37.21,13.5 v1(38.8,13.5)
  Bottom Layer w0.152: v1(38.8,13.5) 38.8,13.51 38.497,13.813 38.497,15.191 39.173,15.867 39.173,19.486 39.96,20.273 P1.3
NetIC1_13: IC1.13 R8.1 | length 30.1
  Top Layer w0.152: R8.1 v1(8.4,3.7) ; v1(32.8,5.679) 32.879,5.6 33.1,5.6 33.886,6.386 34.061,6.386 35.05,7.374 IC1.13
  Bottom Layer w0.152: v1@8.4,3.9 8.4,4.412 9.988,6 16.293,6 16.693,5.6 32.721,5.6 v1(32.8,5.679)
NetIC1_14: IC1.14 R10.1 | length 29.3
  Top Layer w0.152: R10.1 v1(9.6,4.9) ; v1(33.7,5.403) 35.403,7.106 35.403,7.228 35.55,7.374 IC1.14
  Bottom Layer w0.152: v1(9.6,4.9) 10.379,5.679 16.218,5.679 16.722,5.176 33.008,5.176 33.232,5.4 33.697,5.4 v1(33.7,5.403)
NetIC1_15: IC1.15 R15.1 | length 30.3
  Top Layer w0.152: v1(12.2,3.8) R15.1 ; v1(34.894,5.706) 36.05,6.862 IC1.15
  Bottom Layer w0.152: v1(12.2,3.8) 12.794,4.394 35.405,4.394 36.193,5.181 36.193,5.307 35.407,6.093 35.281,6.093 v1(34.894,5.706)
NetIC1_16: IC1.16 R16.1 | length 22.9
  Top Layer w0.152: v1(35.535,5.253) 35.782,5.5 35.8,5.5 35.8,5.9 35.817,5.917 36.55,6.65 IC1.16
  Bottom Layer w0.152: v1(16.05,4.897) 34.797,4.897 35.32,5.42 35.486,5.253 v1(35.535,5.253)
NetIC1_17: IC1.17 R22.1 | length 22.2
  Top Layer w0.152: R22.1 19.9,4.85 20.324,4.426 20.374,4.426 21.737,3.063 v1(36,3.063) ; v1(37.006,6.3) 37.006,6.374 37.025,6.392 37.025,7.937 IC1.17
  Bottom Layer w0.152: v1(36,3.063) 36,4.593 36.583,5.176 36.583,5.876 v1(37.006,6.3)
NetIC1_18: IC1.18 R23.1 | length 18.4
  Top Layer w0.152: R23.1 23.8,4.85 24.224,4.426 24.274,4.426 25.134,3.566 v1(37,3.566) ; v1(37.122,5.403) 37.122,5.524 37.276,5.679 ; 37.276,5.68 37.55,5.953 IC1.18
  Bottom Layer w0.152: v1(37,3.566) 37.061,3.627 37.061,5.342 v1(37.122,5.403)
NetIC1_19: IC1.19 R7.2 | length 38.3
  Top Layer w0.152: IC1.19 38.05,8.935 37.994,8.992 37.994,9.32 38.812,10.138 v1(38.838,10.138)
  Bottom Layer w0.152: R7.2 13.18,19.381 14.199,20.4 26.5,20.4 26.721,20.179 37.521,20.179 38.488,19.212 38.488,15.578 38.217,15.307 38.217,13.249 38.67,12.797 38.67,10.306 v1(38.838,10.138)
NetIC1_20: IC1.20 R9.2 | length 36
  Top Layer w0.152: R9.2 14.48,19.381 16.357,21.259 23.131,21.259 23.612,20.778 34.57,20.778 37.148,18.2 v1(37.7,18.2) ; v1(38.538,9.14) 38.544,9.134 38.544,7.968 IC1.20
  Bottom Layer w0.152: v1(37.7,18.2) 37.659,18.159 37.659,13 38.103,12.556 38.103,10.61 38.017,10.524 38.017,9.802 38.541,9.278 38.541,9.156 38.538,9.153 v1(38.538,9.14)
NetIC1_21: IC1.21 R11.2 | length 35.5
  Top Layer w0.152: IC1.21 39.057,7.969 39.057,9.257 39.295,9.495 v1(39.305,9.495)
  Bottom Layer w0.152: R11.2 15.78,19.381 16.483,20.084 26.421,20.084 26.605,19.9 37.405,19.9 38.209,19.096 38.209,15.694 37.938,15.423 37.938,13.116 38.383,12.671 38.383,10.494 38.297,10.408 38.297,9.968 38.629,9.635 38.755,9.635 38.837,9.552 39.247,9.552 v1(39.305,9.495)
NetIC1_22: IC1.22 R24.2 | length 29.8
  Top Layer w0.152: R24.2 v1(15.8,14.9) ; IC1.22 39.575,7.937 39.575,6.725 v1(39.6,6.7)
  Bottom Layer w0.152: v1(15.8,14.9) 17.421,13.279 27.17,13.279 27.593,13.703 32.595,13.703 39.598,6.7 v1(39.6,6.7)
NetIC1_23: IC1.23 R26.2 | length 28
  Top Layer w0.152: R26.2 v1(18,14.9) ; v1(37.5,9.8) 38.341,10.641 39.07,10.641 40.05,9.662 IC1.23
  Bottom Layer w0.152: v1(18,14.9) 19.341,13.559 26.852,13.559 27.276,13.983 32.711,13.983 36.893,9.8 v1(37.5,9.8)
NetIC1_24: IC1.24 R27.2 | length 26
  Top Layer w0.152: R27.2 v1(20.2,14.9) ; v1(37.5,10.6) 37.707,10.6 38.027,10.921 39.479,10.921 40.55,9.85 IC1.24
  Bottom Layer w0.152: v1(20.2,14.9) 21.262,13.838 26.736,13.838 27.16,14.262 32.826,14.262 36.499,10.589 37.489,10.589 v1(37.5,10.6)
NetIC1_25: IC1.25 R28.2 | length 23.3
  Top Layer w0.152: R28.2 v1(22.3,14.9) ; v1(36.903,11.092) 36.914,11.103 37.815,11.103 37.912,11.2 39.605,11.2 41.208,9.597 41.304,9.597 41.45,9.45 IC1.25
  Bottom Layer w0.152: v1(22.3,14.9) 23.083,14.117 26.62,14.117 27.044,14.541 32.968,14.541 36.418,11.092 v1(36.903,11.092)
NetIC1_26: IC1.26 R31.2 | length 20.9
  Top Layer w0.152: R31.2 v1(23.8,14.9) ; v1(37.6,11.606) 37.686,11.692 37.905,11.692 37.913,11.7 39.5,11.7 41.176,10.024 41.964,10.024 IC1.26
  Bottom Layer w0.152: v1(23.8,14.9) 24.7,14.9 25.203,14.397 26.505,14.397 26.929,14.821 33.084,14.821 36.298,11.606 v1(37.6,11.606)
NetIC1_27: IC1.27 R32.2 | length 18.2
  Top Layer w0.152: v1(37.591,12.356) 39.244,12.356 41.15,10.45 IC1.27
  Bottom Layer w0.152: v1@25.8,14.9 26.613,14.9 26.813,15.1 33.2,15.1 35.9,12.4 37.547,12.4 v1(37.591,12.356)
  other v1: 25.5,14.9
NetIC1_28: IC1.28 R29.1 | length 23.2
  Top Layer w0.152: R29.1 28.763,4.9 29.593,4.07 39.47,4.07 44.603,9.203 v1(44.603,9.98) ; IC1.28 42.063,10.925 43.475,10.925 v1(43.5,10.9)
  Bottom Layer w0.152: v1(43.5,10.9) 44.334,10.066 44.518,10.066 v1(44.603,9.98)
NetIC1_33: IC1.33 R30.1 | length 20.4
  Top Layer w0.152: R30.1 33.759,4.9 33.909,4.75 39.755,4.75 44.1,9.095 44.1,12.664 43.314,13.45 IC1.33
NetIC1_35: IC1.35 P1.2 | length 7.4
  Top Layer w0.152: IC1.35 41.981,14.507 41.189,14.507 41.097,14.599 41.097,18.997 P1.2
NetIC1_36: IC1.36 P1.1 R18.1 | length 6.7
  Top Layer w0.152: IC1.36 42.038,17.398 42.245,17.605 P1.1
NetIC1_41: IC1.41 SB5.2 | length 5.1
  Top Layer w0.152: SB5.2 36.35,19.532 37.178,18.703 37.908,18.703 38.55,18.062 IC1.41
NetIC1_42: IC1.42 R12.2 | length 24.2
  Top Layer w0.152: R12.2 16.98,19.281 18.678,20.979 23.016,20.979 23.497,20.499 34.455,20.499 37.256,17.697 37.651,17.697 38.05,17.298 IC1.42
NetIC1_43: IC1.43 R13.2 | length 22.2
  Top Layer w0.152: v1(18.3,19.4) 18.3,19.489 19.511,20.7 22.9,20.7 23.3,20.3 23.3,20.295 23.376,20.219 34.339,20.219 37.141,17.417 37.476,17.417 37.55,17.343 IC1.43
  Bottom Layer w0.152: v1(18.3,19.4) 18.319,19.381 R13.2
NetIC1_44: IC1.44 R14.2 | length 20
  Top Layer w0.152: R14.2 19.58,19.381 20.619,20.421 22.779,20.421 23.26,19.94 34.223,19.94 36.903,17.26 36.903,17.172 37.05,17.026 IC1.44
NetIC1_45: IC1.45 R17.2 | length 18.1
  Top Layer w0.152: v1(20.7,19.4) 21.384,20.084 22.721,20.084 23.145,19.66 34.059,19.66 36.476,17.243 36.476,16.512 IC1.45
  Bottom Layer w0.152: v1(20.7,19.4) 20.719,19.381 R17.2
NetIC1_46: IC1.46 R19.2 | length 15.7
  Top Layer w0.152: R19.2 33.943,19.381 36.05,17.274 IC1.46
NetIC1_47: IC1.47 R20.2 | length 30.9
  Top Layer w0.152: R20.2 v1(11.4,14.9) ; v1(27.599,12.42) 27.397,12.623 27.397,15.192 29.584,17.379 35.284,17.379 35.403,17.26 35.403,17.172 35.55,17.026 IC1.47
  Bottom Layer w0.152: v1(11.4,14.9) 11.552,14.9 14.028,12.424 27.537,12.424 27.54,12.42 v1(27.599,12.42)
NetIC1_48: IC1.48 R21.2 | length 25.9
  Top Layer w0.152: R21.2 v1(13.6,14.9) ; v1(27.9,13.2) 28.101,13.401 28.101,15.501 29.038,16.438 IC1.48
  Bottom Layer w0.152: v1(13.6,14.9) 15.5,13 27.673,13 27.873,13.2 v1(27.9,13.2)
NetJ2_2: J2.2 R5.2 | length 2.7
  Bottom Layer w0.635: R5.2 69.979,5.7 70.739,6.46 J2.2
NetJ2_3: J2.3 R1.1 R2.1 U2.6 | length 15.4
  Top Layer w0.152: R1.1 64.247,1.717 64.247,5.237 65.1,6.09 U2.6
  Top Layer w0.635: U2.6 65.1,6.29 67.81,9 J2.3
  Bottom Layer w0.635: R2.1 70.339,9.4 70.739,9 J2.3
NetJ3_1: J3.1 J4.1 Q8.3 | length 10.1
  Top Layer w0.152: J4.1 27.096,11.494 27.096,16.376 J3.1
  Top Layer w0.5: J4.1@27.19,11.362 J4.1
  Top Layer w0.508: J4.1@27.19,11.362 28.2,10.352 28.2,9.9 29.1,9 Q8.3
NetJ3_2: J3.2 J4.2 Q7.3 | length 8.7
  Top Layer w0.152: J4.2 26.428,11.908 26.428,12 26.812,12.384 26.812,15.629 26.458,15.983 26.458,15.992 J3.2
  Top Layer w0.5: J4.2 25.92,10.223 26.943,9.2 Q7.3
NetJ3_3: J3.3 J4.3 Q6.3 | length 10.5
  Top Layer w0.152: J4.3 25.45,12.2 26.133,12.2 26.533,12.6 26.533,15.4 26.233,15.7 25.48,15.7 J3.3
  Top Layer w0.5: Q6.3 23.086,9.2 24.532,10.646 24.532,11.282 J4.3
NetJ3_4: J3.4 J4.4 Q5.3 | length 14.8
  Top Layer w0.152: J4.4 24.577,12.597 26.134,12.597 26.253,12.716 26.253,13.884 26.137,14 26.253,14.116 26.253,15.284 26.117,15.421 24.489,15.421 J3.4
  Top Layer w0.5: Q5.3 19.229,9.2 19.479,9.45 19.679,9.45 20.379,10.15 22.335,10.15 23.38,11.195 J4.4
NetJ3_5: J3.5 R19.1 | length 1.5
  Top Layer w0.5: R19.1 22.085,17.926 22.085,16.555 J3.5
NetJ3_6: J3.6 R17.1 | length 1.5
  Bottom Layer w0.5: R17.1 20.8,17.911 20.8,16.57 J3.6
NetJ3_7: J3.7 R14.1 | length 1.5
  Top Layer w0.5: R14.1 19.565,17.946 19.565,16.535 J3.7
NetJ3_8: J3.8 R13.1 | length 1.5
  Bottom Layer w0.5: J3.8 R13.1
NetJ3_9: J3.9 R12.1 | length 1.4
  Top Layer w0.5: R12.1 16.995,17.816 16.995,16.565 J3.9
NetJ3_10: J3.10 R11.1 | length 1.5
  Bottom Layer w0.5: R11.1 15.76,17.951 15.76,16.53 J3.10
NetJ3_11: J3.11 R9.1 | length 1.5
  Top Layer w0.5: R9.1 14.475,17.936 14.475,16.545 J3.11
NetJ3_12: J3.12 R7.1 | length 1.5
  Bottom Layer w0.5: R7.1 13.19,17.921 13.19,16.56 J3.12
NetJ3_13: J3.13 J4.13 Q4.3 | length 10.9
  Top Layer w0.381: J3.13@11.98,16.44 J3.13@12.04,16.5
  Top Layer w0.5: J4.13 12.068,11.282 12.068,10.632 13.7,9 Q4.3
  Bottom Layer w0.254: J4.13 11.95,12.931 10.846,14.035 10.846,15.129 11.98,16.263 J3.13
NetJ3_14: J3.14 J4.14 Q3.3 | length 8.2
  Top Layer w0.381: J4.14@10.68,11.48 J4.14@10.76,11.4
  Top Layer w0.5: J4.14 10.68,10.034 11.514,9.2 Q3.3
  Bottom Layer w0.381: J4.14 10.68,11.637 10.402,11.916 10.402,15.314 10.71,15.622 J3.14
NetJ3_15: J3.15 J4.15 Q2.3 | length 8.5
  Top Layer w0.381: J4.15@9.26,11.4 J4.15@9.41,11.55
  Top Layer w0.5: Q2.3 7.657,9.2 9.292,10.835 9.292,11.282 J4.15
  Bottom Layer w0.5: J4.15 9.425,11.415 9.425,16.485 J3.15
NetJ3_16: J3.16 J4.16 Q1.3 | length 10.7
  Top Layer w0.381: J4.16@8.01,11.4 J4.16@8.14,11.53
  Top Layer w0.5: Q1.3 5.778,9 8.14,11.362 J4.16
  Bottom Layer w0.5: J4.16 8.155,11.415 8.155,16.485 J3.16
NetJ4_5: J4.5 R32.1 | length 4.6
  Top Layer w0.254: J4.5 23.008,12.298 23.811,12.298 24.44,12.927 25.227,12.927 R32.1@25.618,13.318 ; R32.1@25.618,13.118 R32.1@25.8,13.3
NetJ4_6: J4.6 R31.1 | length 3.6
  Top Layer w0.254: J4.6 22.567,13.127 23.227,13.127 R31.1
NetJ4_7: J4.7 R28.1 | length 2.9
  Top Layer w0.254: J4.7 19.57,11.438 20.977,12.845 20.977,13.127 21.35,13.5 R28.1
NetJ4_8: J4.8 R27.1 | length 2.5
  Top Layer w0.254: J4.8 18.3,12.65 19.15,13.5 R27.1
NetJ4_9: J4.9 R26.1 | length 2.1
  Top Layer w0.254: R26.1 17.03,13.47 J4.9
NetJ4_10: J4.10 R24.1 | length 2.5
  Top Layer w0.254: R24.1 14.85,13.5 15.76,12.59 J4.10
NetJ4_11: J4.11 R21.1 | length 2.9
  Top Layer w0.254: R21.1 12.65,13.5 14.49,11.66 J4.11
NetJ4_12: J4.12 R20.1 | length 3.7
  Top Layer w0.254: R20.1 11.12,13.5 J4.12
NetQ1_1: Q1.1 R8.2 | length 6.1
  Top Layer w0.152: Q1.1 2.85,6.6 3.274,6.176 3.624,6.176 3.903,5.897 4.28,5.897 5.953,4.223 5.953,3.897 7,2.85 R8.2@7,2.8
NetQ2_1: Q2.1 R10.2 | length 2
  Top Layer w0.305: Q2.1 6.707,5.193 R10.2
NetQ3_1: Q3.1 R15.2 | length 2
  Top Layer w0.305: Q3.1 10.564,5.136 R15.2
NetQ4_1: Q4.1 R16.2 | length 2
  Top Layer w0.305: Q4.1 14.421,5.129 R16.2
NetQ5_1: Q5.1 R22.2 | length 2
  Top Layer w0.305: Q5.1 18.279,5.121 R22.2
NetQ6_1: Q6.1 R23.2 | length 2
  Top Layer w0.305: Q6.1 22.136,5.164 R23.2
NetQ7_1: Q7.1 R29.2 | length 2
  Top Layer w0.305: Q7.1 25.993,5.107 R29.2
NetQ8_1: Q8.1 R30.2 | length 2
  Top Layer w0.305: Q8.1 29.85,5.15 R30.2
NetR1_2: R1.2 R3.2 U2.3 | length 17.9
  Top Layer w0.152: R3.2 52.494,11.6 53.303,10.791 53.303,8.887 55.9,6.29 U2.3 55.9,6.09 56.8,5.19 56.8,1.88 57.22,1.46 R1.2
NetR5_1: R5.1 R6.1 U3.3 | length 10.4
  Bottom Layer w0.152: R6.1 64.247,13.533 64.247,7.143 65.1,6.29 U3.3 U3.3@65.1,6.09
  Bottom Layer w0.635: U3.3@65.1,6.09 65.433,5.757 65.533,5.757 65.59,5.7 R5.1
VCC_ISO: C1.2 J2.4 R2.2 U2.7 U2.8 U3.2 | length 19.6
  Top Layer w0.635: v1(66.987,9.362) 66.355,8.73 U2.7 U2.8 65.235,11.405 70.865,11.405 J2.4
  Bottom Layer w0.635: U3.2@65.1,8.63 U3.2 66.957,8.73 66.987,8.7 ; C1.2@66.95,7.615 C1.2 66.987,7.637 66.987,8.7 ; J2.4 68.911,11.54 67.48,10.109 67.48,9.93 67.025,9.475 R2.2 v1(66.987,9.362) 66.987,8.7
pads on no net: D3.2 D4.2 U2.1 U2.4 U3.1 U3.4

## Polygon pours and split planes (outlines as drawn)
GND on Bottom Layer "NONET_L01_P-001" (solid, pour order 2): 56.75,0 56.75,22 0,22 0,0
+3V3 on Bottom Layer "NONET_L01_P-001" (solid, pour order 0): 54.9,5.6 54.9,7.2 55.6,7.9 56.6,7.9 56.6,12 56.5,12.1 55.2,12.1 55.2,10.8 53.9,9.5 52.2,9.5 51.7,10 51.7,11.9 50.8,12.8 47.9,12.8 44.6,9.5 42.2,9.5 40.1,7.4 40.1,6.3 40.1,1.9 43,1.9 48.9,1.9 48.9,0.7 49.2,0.4 50.9,0.4 51.8,1.3 51.8,3.6 53.2,3.6 53.7,4.1 53.7,5.6
GND on Top Layer "NONET_L01_P-001" (solid, pour order 3): 56.75,0 56.75,22 0,22 0,0
+3V3 on Top Layer "NONET_L01_P-001" (solid, pour order 1): 51.1,1.9 53.8,4.6 53.8,10 52.2,11.6 52,11.4 44.3,11.4 44.3,8.9 39,3.6 39,1.9

## Keep-outs
Top Layer:
  circle w0.75: c3,19 r2.25
  circle w0.75: c3,3 r2.25
  region: 5.1,21 5.1,18.9 5.6,18.9 5.6,21
  region: 0,22 0,16.4 1.1,16.4 1.1,22
  region: 3,22 3,20.9 5.6,20.9 5.6,22
  rectangle: 0.5,16.4 2.6,16.9
  region: 5.6,0.5 5.6,2.6 5.1,2.6 5.1,0.5
  rectangle: 0,3 1.1,5.6
  rectangle: 0,0 5.6,1.1
  rectangle: 1,5.1 3.1,5.6
Bottom Layer:
  circle w0.75: c3,19 r2.25
  circle w0.75: c3,3 r2.25
  region: 3,22 3,20.9 5.6,20.9 5.6,22
  region: 0,22 0,16.4 1.1,16.4 1.1,22
  region: 5.1,21 5.1,18.9 5.6,18.9 5.6,21
  region: 1,16.75 1,16.4 3,16.4 3,16.75
  rectangle: 5.25,1 5.6,3
  rectangle: 1,5.1 3.1,5.6
  rectangle: 0,0 5.6,1.1
  rectangle: 0,3 1.1,5.6

## Silkscreen, mask and mechanical layers (free items; w line width, h text height)
Top Overlay:
  lines w0.16: 31.7,10.2 31.7,9.7 32.6,8.9
  text "GND" at 62.925,16.334 h1.25 r90
  text "+5V" at 64.663,16.334 h1.25 r90
  text "IN1" at 66.447,16.334 h1.25 r90
  text "IN2" at 68.23,16.334 h1.25 r90
  text "VCC" at 74.834,12.875 h1.25
  text "TX" at 74.834,10.875 h1.25
  text "RX" at 74.834,8.875 h1.25
  text "GND" at 74.834,6.875 h1.25
  text "PAVEL SAFAR 2020 / VU-METER DRIVER V1.0" at 10.267,0.126 h0.9
Bottom Overlay:
  the board outline again, w0.16

## Text inside footprints (layer, text, board x,y; h text height)
C5: Top Overlay "+" at 50.469,5.162 h1.52 r180